# Altium PCB PCB2.PcbDoc
Units mm, origin at the board's own origin, x right, y up, seen from the top; angles counter-clockwise.
Board outline 78.06 x 41.92 mm, 2 copper layers (Top Layer, Bottom Layer); 63 components, 34 nets, 175 pads, 3 vias.
Unrouted connection lines stored in the file: 74.
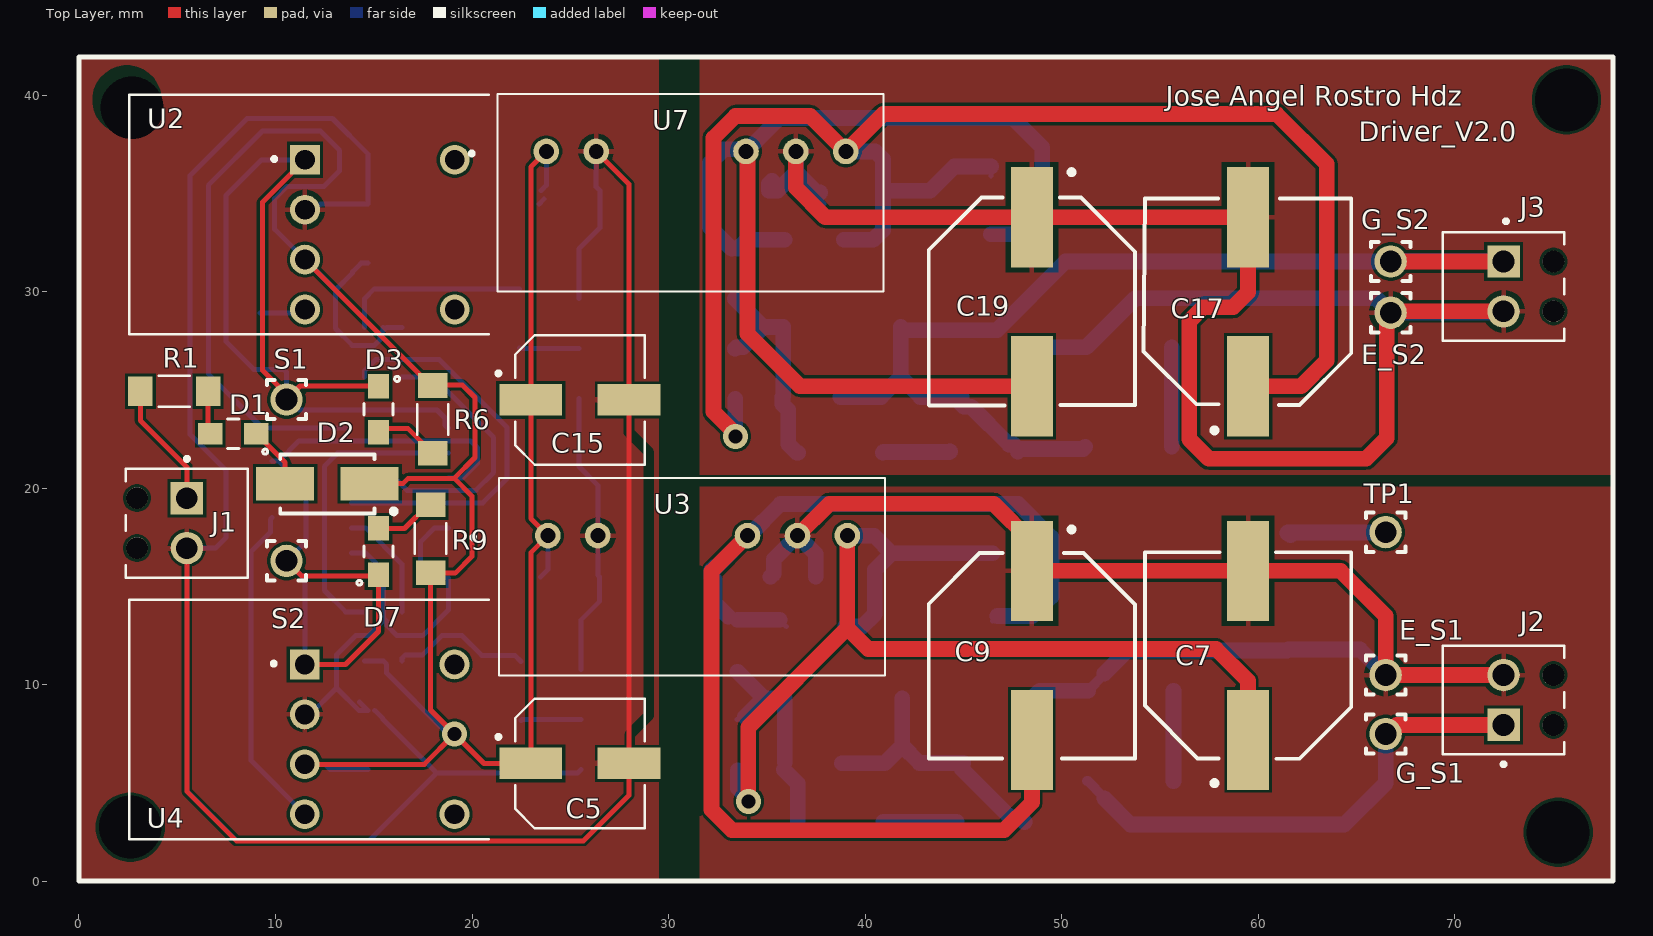
[diagram p0: Top Layer view]
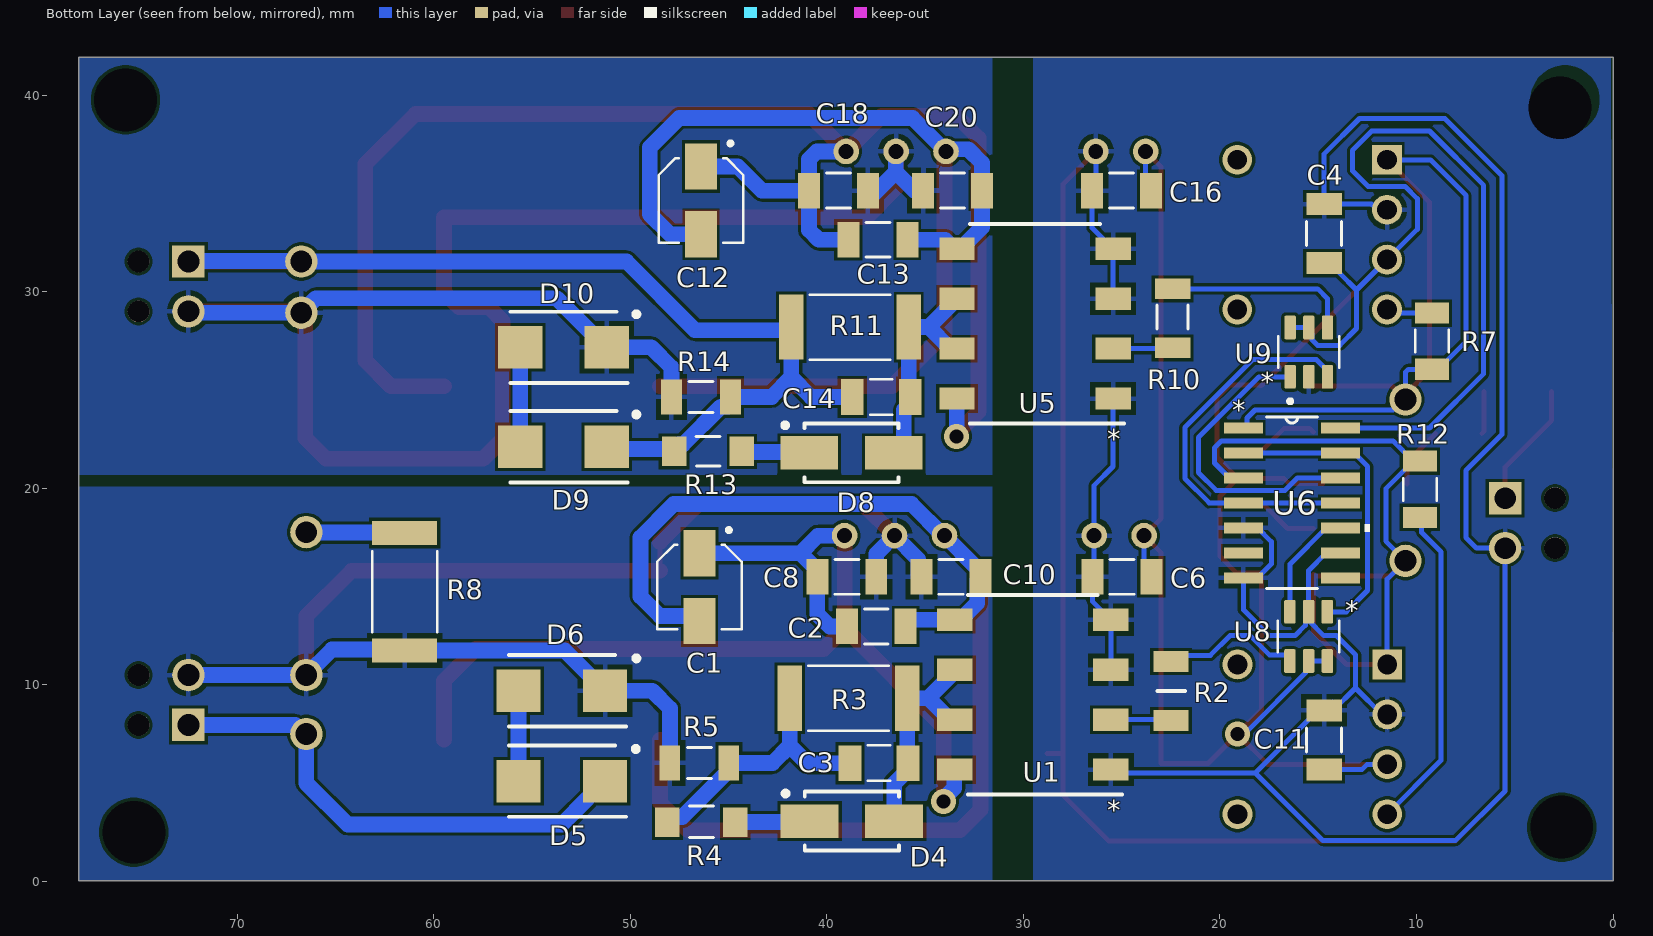
[diagram p1: Bottom Layer view, seen from below]
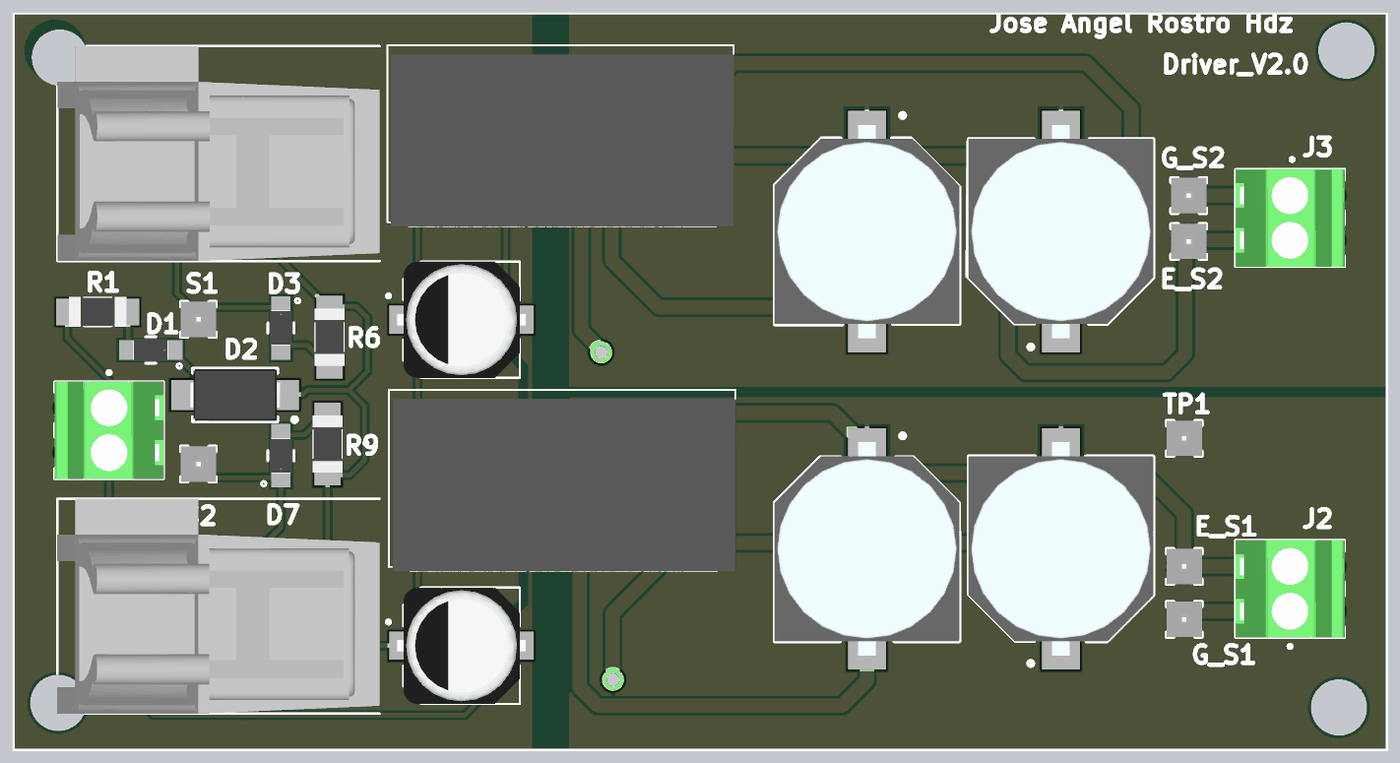
[diagram p2: 3D render of the assembled board from above, using the file's embedded part models]
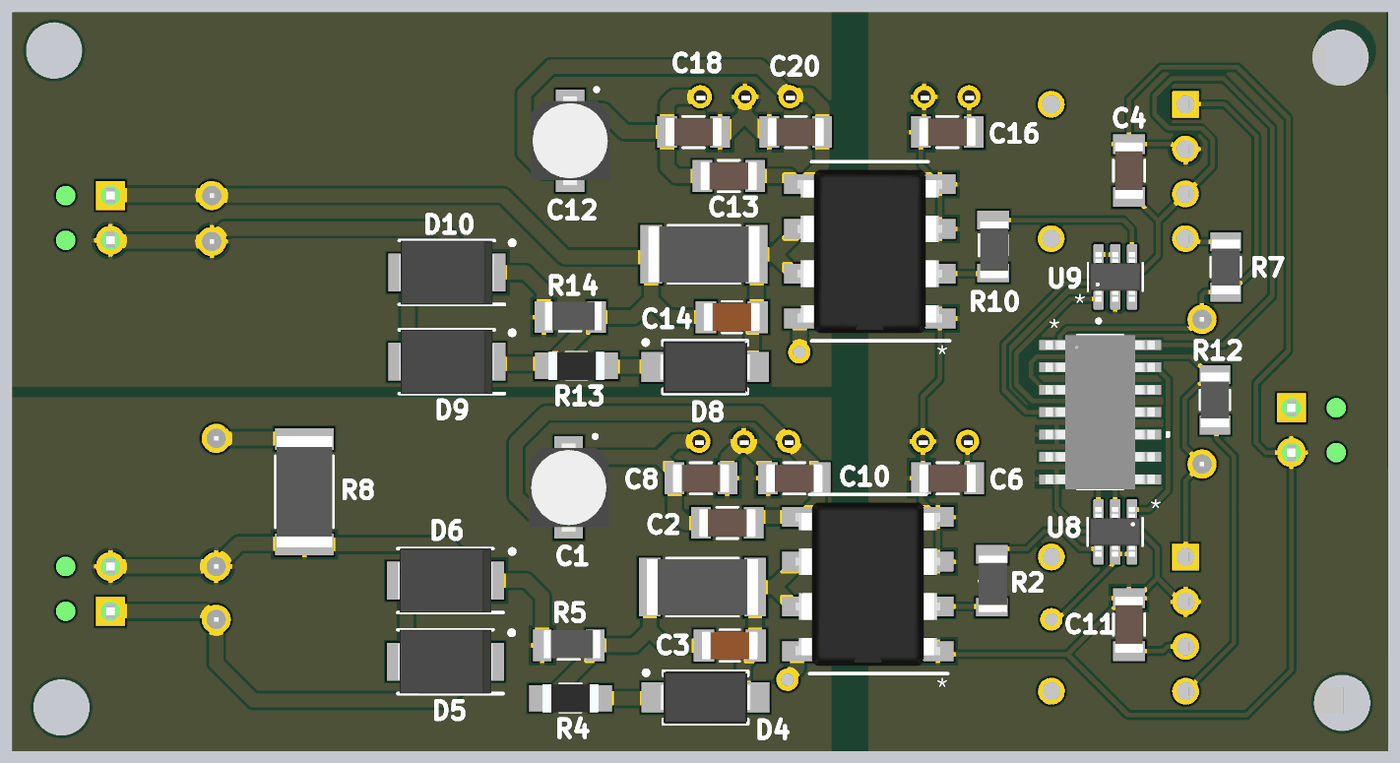
[diagram p3: 3D render of the assembled board from below, using the file's embedded part models]

## Layer stack, top to bottom
Top Solder: solder mask 0.0102, Solder Resist, Dk 3.5
Top Layer: signal copper 0.0356
Dielectric 1: dielectric 0.32, FR-4, Dk 4.8
Bottom Layer: signal copper 0.0356
Bottom Solder: solder mask 0.0102, Solder Resist, Dk 3.5

## Board outline
0,0.01 78.06,0.01 78.06,41.93 0,41.93

## Design rules (kind name [scope] priority, off if disabled: settings)
Clearance [All] p1: gap=0.15 ignorepadtopadclearanceinfootprint=FALSE
PlaneConnect [All] p1: planeconnectstyle=Direct reliefexpansion=0.508 reliefentries=4 reliefconductorwidth=0.254 reliefairgap=0.254
PolygonConnect [All] p1: connectstyle=Direct reliefconductorwidth=0.254 reliefentries=4 polygonreliefangle="90 Angle" airgapwidth=0.254
RoutingVias [All] p1: holewidth=0.711 width=1.27 viastyle="Through Hole" minholewidth=0.711 minwidth=1.27 maxholewidth=0.711 maxwidth=1.27
SolderMaskExpansion [All] p1: expansion=0.102 istentingtop=FALSE
Width Potencia [All] p1: maxlimit=0.8 minlimit=0.254 preferedwidth=0.5
Width Width_GND [InNet('GND_5VCC')] p2: maxlimit=3 minlimit=0.2 preferedwidth=0.8
Width [All] p3: maxlimit=0.254 minlimit=0.254 preferedwidth=0.254
29 further rules are at their usual default settings.

## Components (designator, comment, footprint, x,y, rotation, side; value= is the part's Value field where it differs from the comment)
C1 "1uF" CAPAE430X550N 46.49,14.967 r270 bottom
C2 "100nF" CAPC3216X94N#1 37.49,12.963 r0 bottom
C3 "470pF" CAPC3216X94N#2 37.35,6.005 r0 bottom
C4 "100nF" CAPC3216X94N#1 14.7,32.95 r90 bottom
C5 "22uF" CAP_EEE1HA220WP 25.49,5.991 r0 top
C6 "100nF" CAPC3216X94N#1 24.994,15.49 r180 bottom
C7 "220uF" CAPAE1050X1430N 59.49,11.49 r90 top
C8 "100nF" CAPC3216X94N#1 38.989,15.49 r0 bottom
C9 "220uF" CAPAE1050X1430N 48.49,11.49 r270 top
C10 "100nF" CAPC3216X94N#1 33.69,15.49 r0 bottom
C11 "100nF" CAPC3216X94N#1 14.7,7.192 r90 bottom
C12 "1uF" CAPAE430X550N 46.41,34.643 r270 bottom
C13 "100nF" CAPC3216X94N#1 37.41,32.64 r0 bottom
C14 "470pF" CAPC3216X94N#2 37.235,24.64 r0 bottom
C15 "22uF" CAP_EEE1HA220WP 25.49,24.49 r0 top
C16 "100nF" CAPC3216X94N#1 25.01,35.14 r180 bottom
C17 "220uF" CAPAE1050X1430N 59.49,29.49 r90 top
C18 "100nF" CAPC3216X94N#1 39.41,35.14 r0 bottom
C19 "220uF" CAPAE1050X1430N 48.49,29.49 r270 top
C20 "100nF" CAPC3216X94N#1 33.61,35.14 r0 bottom
D1 "LED_G" LED_KP-2012_KNB 7.854,22.77 r180 top
D2 "ES1ALHR3" DIOM4427X25M 12.64,20.22 r180 top
D3 "LED_G" LED_KP-2012_KNB 15.24,24.021 r270 top
D4 "ES1ALHR3" DIOM4427X25M 38.73,3.06 r180 bottom
D5 "DIODO ZENER1" DIOM5436X247N 53.49,5.09 r0 bottom
D6 "DIODO ZENER1" DIOM5436X247N 53.49,9.69 r0 bottom
D7 "LED_G" LED_KP-2012_KNB 15.24,16.776 r90 top
D8 "ES1ALHR3" DIOM4427X25M 38.75,21.8 r180 bottom
D9 "DIODO ZENER1" DIOM5436X247N 53.41,22.105 r0 bottom
D10 "DIODO ZENER1" DIOM5436X247N 53.41,27.165 r0 bottom
E_S1 "MTMM-101-X-X-S-X" SAMTEC_MTMM-101-X-X-S-X 66.49,10.49 r0 top
E_S2 "MTMM-101-X-X-S-X" SAMTEC_MTMM-101-X-X-S-X 66.745,28.928 r0 top
G_S1 "MTMM-101-X-X-S-X" SAMTEC_MTMM-101-X-X-S-X 66.49,7.49 r0 top
G_S2 "MTMM-101-X-X-S-X" SAMTEC_MTMM-101-X-X-S-X 66.745,31.533 r0 top
J1 "VDC_+5" PHOENIX_1725656#1 2.39,20.99 r270 top
J2 "Control_Signal" PHOENIX_1725656#2 75.59,6.45 r90 top
J3 "Control_Signal" PHOENIX_1725656#3 75.59,27.493 r90 top
R1 "2.2k" RES_ERJS08F2201V 4.85,24.93 r0 top
R2 "510R" RESC3216X60N 22.49,9.68 r270 bottom
R3 "10R" RESC6331X70N 38.905,9.315 r0 bottom
R4 "29R" ERJ8ENF1000V 46.39,3.01 r0 bottom
R5 "47K" RESC3216X60N 46.49,6.015 r180 bottom
R6 "2.2k" RES_ERJS08F2201V 18,23.5 r270 top
R7 "4.7K" RESC3116X65N 9.22,27.48 r90 bottom
R8 "1M" RESC6331X70N 61.49,14.73 r270 bottom
R9 "2.2k" RES_ERJS08F2201V 17.89,17.43 r90 top
R10 "510R" RESC3216X60N 22.41,28.64 r270 bottom
R11 "10R" RESC6331X70N 38.825,28.195 r0 bottom
R12 "4.7K" RESC3116X65N 9.83,19.94 r270 bottom
R13 "29R" ERJ8ENF1000V 46.05,21.87 r0 bottom
R14 "47K" RESC3216X60N 46.41,24.64 r180 bottom
S1 "MTMM-101-X-X-S-X" SAMTEC_MTMM-101-X-X-S-X 10.56,24.51 r0 top
S2 "MTMM-101-X-X-S-X" SAMTEC_MTMM-101-X-X-S-X 10.56,16.3 r0 top
TP1 "MTMM-101-X-X-S-X" SAMTEC_MTMM-101-X-X-S-X 66.49,17.76 r0 top
U1 "ACPL-3130-360E" DIP794W53P254L959H508Q8N 29.52,9.49 r0 bottom
U2 "HFBR-2531Z" XDCR_HFBR-2531Z 15.31,32.9 r90 top
U3 "MGJ2D051505SC_6" MGJ2D051505SC 30.49,15.49 r0 top
U4 "HFBR-2531Z" XDCR_HFBR-2531Z 15.3,7.22 r90 top
U5 "ACPL-3130-360E" DIP794W53P254L959H508Q8N 29.41,28.37 r0 bottom
U6 "SN74LS04D" D14 16.341,19.25 r180 bottom locked
U7 "MGJ2D051505SC_6" MGJ2D051505SC 30.41,35.04 r0 top
U8 "SN74LVC1G11DBVR" SOT95P280X145-6N 15.49,12.455 r270 bottom
U9 "SN74LVC1G11DBVR" SOT95P280X145-6N 15.48,26.92 r90 bottom

## Footprints (in the part's own frame and the unit in brackets; to place one, negate y for a bottom-side part, rotate by r counter-clockwise, add the part's x,y. Pads: shape width x height; smd on the part's side, far side on the other; paste and mask are expansions set on the pad)
CAP_EEE1HA220WP [mm]
  rect 3.2x1.6 smd: 1(-2.5,0) 2(2.5,0)
  silkscreen extent -4.25,-3.3 3.3,3.3, body extent -3.65,-3.3 3.65,3.3, height 5.8
CAPAE430X550N [mm]
  rect 2.36x1.62 smd: 1(-1.725,0) 2(1.725,0)
  silkscreen extent -3,-2.15 2.15,2.15, body extent -2.5,-2.25 2.5,2.25, height 5.57
CAPAE1050X1430N [mm]
  rect 5.1x2.15 smd: 1(-4.3,0) 2(4.3,0)
  silkscreen extent -5.24,-5.25 5.25,5.25, body extent -6.05,-5.25 6.05,5.25, height 14.3
CAPC3216X94N#1 [mil]
  rect 44x71 smd: 1(-59,0) 2(59,0)
  silkscreen extent -24,-35 24,35, body extent -63,-31 63,31, height 37
CAPC3216X94N#2 [mil]
  rect 45.67x71.65 smd: 1(-58.07,0) 2(58.07,0)
  silkscreen extent -22,-35 22,35, body extent -63,-31 63,31, height 37
D14 [mil]
  rect 78x22 smd paste+0 mask+0: 1(-97,150) 2(-97,100) 3(-97,50) 4(-97,0) 5(-97,-50) 6(-97,-100) 7(-97,-150) 8(97,-150) 9(97,-100) 10(97,-50) 11(97,0) 12(97,50) 13(97,100) 14(97,150)
  silkscreen extent -51,-172 156,172, body extent -122,-172 122,172, height 69
DIOM4427X25M [mm] "Molded Diode, 2-Leads, Body 4.38x2.73mm, IPC Low Density"
  rect 2.95x1.7 smd: 1(-2.15,0) 2(2.15,0)
  silkscreen extent -3.5,-1.5 2.4,1.52, body extent -2.6,-1.48 2.6,1.48, height 2.5
DIOM5436X247N [mm]
  rect 2.25x2.15 smd: 1(-2.2,0) 2(2.2,0)
  silkscreen extent -3.27,-1.81 2.7,1.81, body extent -2.7,-1.81 2.7,1.81, height 2.47
DIP794W53P254L959H508Q8N [mm]
  rect 1.8x1.13 smd: 1(-3.97,3.81) 2(-3.97,1.27) 3(-3.97,-1.27) 4(-3.97,-3.81) 5(3.97,-3.81) 6(3.97,-1.27) 7(3.97,1.27) 8(3.97,3.81)
  silkscreen extent -4.53,-5.08 3.3,5.08, body extent -4.1,-4.64 4.1,4.64, height 7.56
ERJ8ENF1000V [mm]
  rect 1.25x1.5 smd: 1(-1.725,0) 2(1.725,0)
  body extent -1.6,-0.8 1.6,0.8, height 0.6
LED_KP-2012_KNB [mil]
  rect 49x43 smd paste+0 mask+0: 1(-46.26,0) 2(46.26,0)
  silkscreen extent -69,-30 11,41, body extent -39,-24 39,24, height 43
MGJ2D051505SC [mm]
  round 1.303 hole 0.76: 1(-6.63,2.095) 2(-4.09,2.095) 5(3.53,2.095) 6(6.07,2.095) 7(8.61,2.095)
  silkscreen extent -10.52,-5.02 10.53,5.02, body extent -8.94,-5.29 10.56,4.53, height 12.67
PHOENIX_1725656#1 [mm]
  rect 1.65x1.65 / inner round 1.65 / far side rect 1.65x1.65 hole 1.1: 1(1.5,3.1)
  round 1.65 hole 1.1: 2(4.04,3.1)
  round 1.1 hole 1.1 unplated: ""(1.5,0.56) ""(4.04,0.56)
  silkscreen extent -0.6,0 5.54,6.2, body extent 0,0 5.54,6.2, height 8.65
PHOENIX_1725656#2 [mm]
  rect 1.65x1.65 hole 1.1: 1(1.5,3.1)
  round 1.65 hole 1.1: 2(4.04,3.1)
  round 1.1 hole 1.1 unplated: ""(1.5,0.56) ""(4.04,0.56)
  silkscreen extent -0.6,0 5.54,6.2, body extent 0,0 5.54,6.2, height 8.65
PHOENIX_1725656#3 [mm]
  round 1.65 hole 1.1: 1(1.5,3.1)
  rect 1.65x1.65 hole 1.1: 2(4.04,3.1)
  round 1.1 hole 1.1 unplated: ""(1.5,0.56) ""(4.04,0.56)
  silkscreen extent 0,0 6.19,6.2, body extent 0,0 5.54,6.2, height 8.65
RES_ERJS08F2201V [mm]
  rect 1.25x1.5 smd: 1(-1.725,0) 2(1.725,0)
  silkscreen extent -0.78,-0.8 0.78,0.8, body extent -1.63,-0.85 1.63,0.85, height 0.66
RESC3116X65N [mm]
  rect 1.07x1.73 smd: 1(-1.43,0) 2(1.43,0)
  silkscreen extent -0.57,-0.85 0.57,0.85, body extent -1.55,-0.8 1.55,0.8, height 0.65
RESC3216X60N [mm]
  rect 1.05x1.8 smd: 1(-1.5,0) 2(1.5,0)
  silkscreen extent 0,-0.7 0,0.7, body extent -1.42,-0.74 1.78,0.86, height 0.55
RESC6331X70N [mm]
  rect 1.24x3.32 smd: 1(-2.99,0) 2(2.99,0)
  silkscreen extent -2.05,-1.65 2.05,1.65, body extent -3.15,-1.58 3.15,1.58, height 0.7
SAMTEC_MTMM-101-X-X-S-X [mm]
  round 1.65 hole 1.1: 01(0,0)
  silkscreen extent -1,-1 1,1, body extent -1,-1 1,1, height 4.55
SOT95P280X145-6N [mm]
  rrect25% 1.21x0.58 smd: 1(-1.255,0.95) 2(-1.255,0) 3(-1.255,-0.95) 4(1.255,-0.95) 5(1.255,0) 6(1.255,0.95)
  silkscreen extent -0.8,-1.56 0.8,1.56, body extent -1.4,-1.45 1.4,1.45, height 1.45
XDCR_HFBR-2531Z [mm]
  rect 1.518x1.518 / inner round 1.518 / far side rect 1.518x1.518 hole 1.01: 1(3.81,3.81)
  round 1.518 hole 1.01: 2(1.27,3.81) 3(-1.27,3.81) 4(-3.81,3.81) 5(-3.81,-3.81) 8(3.81,-3.81)
  silkscreen extent -5.08,-5.54 7.11,12.75, body extent -5.08,-5.54 7.11,12.75, height 18.8

## Part data
C1 C12: library part UWX1H010MCL1GB, "Capacitor 1uF", Mfr_Name=Nichicon
C2 C4 C6 C8 C10 C11 C13 C16 C18 C20: library part 12063C104MAT2A, "Capacitor", Manufacturer_Name="Kyocera AVX", Mouser Part Number=581-12063C104MAT2A, Arrow Part Number=12063C104MAT2A, Arrow Price/Stock=https://www.arrow.com/en/products/12063c104mat2a/avx, Manufacturer_Part_Number=12063C104MAT2A, Mouser Price/Stock=https://www.mouser.co.uk/ProductDetail/KYOCERA-AVX/12063C104MAT2A?qs=m0JgOP0RQqUryqdkhb8UmQ%3D%3D
C3 C14: library part MC1206N471J101CT, "Cap Ceramic 470pF 100V C0G 5% Pad SMD 1206 125Â°C T/R", Package="3216 AVX", Check_prices=https://www.snapeda.com/parts/12061A471JAT2A/Kyocera/view-part/?ref=eda, MF="KYOCERA AVX Components", MP=12061A471JAT2A, SnapEDA_Link=https://www.snapeda.com/parts/12061A471JAT2A/Kyocera/view-part/?ref=snap
C5 C15: library part EEE1HA220WP, "22ÂµF 50V Aluminum Electrolytic Capacitors Radial, Can - SMD 1000 Hrs @ 85Â°C", Package="RADIAL-2 Panasonic", Check_prices=https://www.snapeda.com/parts/EEE1HA220WP/Panasonic/view-part/?ref=eda, Digi-Key_Part_Number=PCE3920TR-ND, MF=Panasonic, MP=EEE1HA220WP, SnapEDA_Link=https://www.snapeda.com/parts/EEE1HA220WP/Panasonic/view-part/?ref=snap
C7 C9 C17 C19: library part MAL215097102E3, "Capacitor Polarised", Manufacturer_Name=Vishay, Mouser Part Number=594-MAL215097102E3, Arrow Part Number=MAL215097102E3, Arrow Price/Stock=https://www.arrow.com/en/products/mal215097102e3/vishay?region=europe, Datasheet Link=https://www.vishay.com/docs/28395/150crz.pdf, Height=14.3mm, Manufacturer_Part_Number=MAL215097102E3, Mouser Price/Stock=https://www.mouser.co.uk/ProductDetail/Vishay-BC-Components/MAL215097102E3?qs=qmStTZH4TznNa7zgwdGJWg%3D%3D
D1 D3 D7: library part KP-2012SGC, "KP-2012SGC", Manufacturer_Name=Kingbright, Copyright="Copyright (C) 2025 Ultra Librarian. All rights reserved.", Manufacturer_Part_Number=KP-2012SGC, Type="LED Indication"
D2 D4 D8: library part ES1ALHR3_1, "Rectifiers 1A, 50V, SUPER FAST SM RECTIFIER", Manufacturer_Name="Taiwan Semiconductor", Mouser Part Number=821-ES1ALHR3, Datasheet Link=https://componentsearchengine.com/Datasheets/1/ES1ALHR3.pdf, Geometry.Height=1.43mm, Manufacturer_Part_Number=ES1ALHR3, Mouser Price/Stock=https://www.mouser.co.uk/ProductDetail/Taiwan-Semiconductor/ES1ALHR3?qs=70cth9uAySfs%2F8RIhd19cA%3D%3D
D5 D6 D9 D10: library part 1SMB5931BT3G, "Zener Diode", Manufacturer_Name=onsemi, Mouser Part Number=863-1SMB5931BT3G, Arrow Part Number=1SMB5931BT3G, Arrow Price/Stock=https://www.arrow.com/en/products/1smb5931bt3g/on-semiconductor?region=nac, Datasheet Link=https://www.onsemi.com/pub/Collateral/1SMB5913BT3-D.PDF, Height=2.47mm, Manufacturer_Part_Number=1SMB5931BT3G, Mouser Price/Stock=https://www.mouser.co.uk/ProductDetail/onsemi/1SMB5931BT3G?qs=vLkC5FC1VN903PRAv1AUyg%3D%3D
E_S1 E_S2 G_S1 G_S2 S1 S2 TP1: "Connector Header Through Hole 1 position", Package=None, Check_prices=https://www.snapeda.com/parts/MTMM-101-05-G-S-225/Samtec/view-part/?ref=eda, MF=Samtec, MP=MTMM-101-05-G-S-225, SnapEDA_Link=https://www.snapeda.com/parts/MTMM-101-05-G-S-225/Samtec/view-part/?ref=snap
J1 J2 J3: library part 1725656, "Conn PC Terminal Block 2 POS 2.54mm Solder ST Thru-Hole 6A Cardboard"
R1: library part ERJS08F2201V, "ERJS08F2201V", Package=None, Availability=Unavailable, MP=ERJS08F2201V, Price=None
R2 R10: library part CRCW1206510RFKEA, "Resistor", Manufacturer_Name=Vishay, Mouser Part Number=71-CRCW1206-510-E3, Arrow Part Number=CRCW1206510RFKEA, Arrow Price/Stock=https://www.arrow.com/en/products/crcw1206510rfkea/vishay?region=nac, Datasheet Link=http://www.vishay.com/docs/20035/dcrcwe3.pdf, Height=0.6mm, Manufacturer_Part_Number=CRCW1206510RFKEA, Mouser Price/Stock=https://www.mouser.co.uk/ProductDetail/Vishay-Dale/CRCW1206510RFKEA?qs=ZY%2FA15UmqnAPhzXgP9t8Ag%3D%3D
R3 R11: library part CRCW251210R0FKEGHP, "10 Ohms Â±1% 1.5W Chip Resistor 2512 (6432 Metric) Automotive AEC-Q200, Pulse Withstanding Thick Film", Package="6331 Vishay", Check_prices=https://www.snapeda.com/parts/CRCW251210R0FKEGHP/Vishay/view-part/?ref=eda, MF=Vishay, MP=CRCW251210R0FKEGHP, SnapEDA_Link=https://www.snapeda.com/parts/CRCW251210R0FKEGHP/Vishay/view-part/?ref=snap
R4 R13: library part ERJ-8ENF30R0V, "Resistor", Manufacturer_Name=Panasonic, Mouser Part Number=667-ERJ-8ENF30R0V, Arrow Part Number=ERJ-8ENF30R0V, Arrow Price/Stock=https://www.arrow.com/en/products/erj-8enf30r0v/panasonic?region=nac, Datasheet Link=https://industrial.panasonic.com/cdbs/www-data/pdf/RDA0000/AOA0000C86.pdf, Height=0.7mm, Manufacturer_Part_Number=ERJ-8ENF30R0V, Mouser Price/Stock=https://www.mouser.co.uk/ProductDetail/Panasonic/ERJ-8ENF30R0V?qs=8%252BG0TiN%2FgVqUsQIC4%252BVXug%3D%3D
R5 R14: library part CRCW120647K0FKEA, "Resistor", Manufacturer_Name=Vishay, Mouser Part Number=71-CRCW1206-47K-E3, Arrow Part Number=CRCW120647K0FKEA, Arrow Price/Stock=https://www.arrow.com/en/products/crcw120647k0fkea/vishay, Datasheet Link=http://www.vishay.com/docs/20035/dcrcwe3.pdf, Height=0.6mm, Manufacturer_Part_Number=CRCW120647K0FKEA, Mouser Price/Stock=https://www.mouser.co.uk/ProductDetail/Vishay-Dale/CRCW120647K0FKEA?qs=9sFvXT%252Bien1tefUS4L1XFw%3D%3D
R6 R9: library part ERJS08F2201V, "Resistor Film ERJS08F2201V", Package=None, Availability=Unavailable, MP=ERJS08F2201V, Price=None
R7 R12: library part CRS1206-FX-4701ELF, "RES, SMD, 4.7K ohm, 0.5W, 1%, 1206, TCR100", Package="3116 Bourns", Check_prices=https://www.snapeda.com/parts/CRS1206-FX-4701ELF/Bourns/view-part/?ref=eda, MF=Bourns, MP=CRS1206-FX-4701ELF, SnapEDA_Link=https://www.snapeda.com/parts/CRS1206-FX-4701ELF/Bourns/view-part/?ref=snap
R8: library part HV733ATTE1004F, "Resistencia SMD de Tipo Chip, 1 Mohm, ± 1%, 1 W, 2512 [Métrica 6432], Película Gruesa", Mfr_Name="KOA Speer"
U1 U5: "Integrated Circuit", Manufacturer_Name="Avago Technologies", Mouser Part Number=630-ACPL-3130-360E, Datasheet Link=https://datasheet.datasheetarchive.com/originals/distributors/Datasheets-DGA20/76560.pdf, Height=4.7mm, Manufacturer_Part_Number=ACPL-3130-360E, Mouser Price/Stock=https://www.mouser.co.uk/ProductDetail/Broadcom-Avago/ACPL-3130-360E?qs=RuhU64sK2%252BvV1O6%252BbM9CBg%3D%3D
U2 U4: "Fiber Optic Receiver - 5MBd - 7V 10 mA", Package=None, Check_prices=https://www.snapeda.com/parts/HFBR-2531Z/Broadcom+Limited/view-part/?ref=eda, MF="Broadcom Limited", MP=HFBR-2531Z, SnapEDA_Link=https://www.snapeda.com/parts/HFBR-2531Z/Broadcom+Limited/view-part/?ref=snap
U3 U7: library part MGJ2D051505SC, "Undefined or Miscellaneous", Manufacturer_Name="Murata Electronics", Mouser Part Number=580-MGJ2D051505SC, Arrow Part Number=MGJ2D051505SC, Arrow Price/Stock=https://www.arrow.com/en/products/mgj2d051505sc/murata-power-solutions?region=nac, Datasheet Link=https://power.murata.com/datasheet?/data/power/ncl/kdc_mgj2.pdf, Height=12mm, Manufacturer_Part_Number=MGJ2D051505SC, Mouser Price/Stock=https://www.mouser.co.uk/ProductDetail/Murata-Power-Solutions/MGJ2D051505SC?qs=xLDY6iXSiQZoZsK%252BwBpeSQ%3D%3D
U6: "Integrated Circuit", Mfr_Name="Texas Instruments", RefDes=RefDes, Type=Type
U8 U9: "1-ch, 3-input 1.65-V to 5.5-V 32 mA drive strength AND gate", Package="SOT-23-6 Texas Instruments", Check_prices=https://www.snapeda.com/parts/SN74LVC1G11DBVR/Texas+Instruments/view-part/?ref=eda, MF="Texas Instruments", MP=SN74LVC1G11DBVR, SnapEDA_Link=https://www.snapeda.com/parts/SN74LVC1G11DBVR/Texas+Instruments/view-part/?ref=snap

## Free pads (board coordinates)
  round 1.524 hole 3.2 unplated: 7(2.61,2.75) 7(2.7,39.36) 7(75.27,2.49) 7(75.69,39.76)

## Via types
v1: diameter 1.27, hole 0.711, Top Layer to Bottom Layer, 3 vias

## Nets (pads, with @x,y where several pads share a name; then routed paths per layer and width w, separated by ;. In a path a pad name is that pad's centre, name@x,y a point inside that pad or via, vN(x,y) a via of type N, cw(c..) or ccw(c..) an arc to the next point about the centre after c; other vN are vias at no path point)
+5VCC: C4.1 C5.1 C6.2 C11.1 C15.1 C16.2 D2.1 R6.1 R9.1 U2.3 U3.1 U4.3 U6.14 U7.1 U8.5 U8.6 U9.5 U9.6 | length 141.1
  Top Layer w0.254: U4.3 17.57,5.95 v1(19.11,7.49) ; U2.3 17.377,25.753 17.377,25.723 17.875,25.225 R6.1 18.028,25.253 19.507,25.253 20.15,24.61 20.15,21.56 19.09,20.5 ; D2.1 14.819,20.249 16.497,20.249 16.748,20.5 19.09,20.5 ; U7.1 22.99,36.345 22.99,18.455 U3.1 22.99,16.715 C5.1 20.609,5.991 v1(19.11,7.49) ; 19.09,20.5 19.99,19.6 19.99,16.52 19.145,15.675 17.92,15.675 R9.1 17.89,8.71 v1(19.11,7.49)
  Bottom Layer w0.254: U4.3 12.51,5.95 12.767,5.693 C11.1 ; U6.14@13.629,23.06 9.34,23.06 6.58,25.82 6.58,35.41 9.34,38.17 12.28,38.17 13.26,37.19 13.26,36.15 12.46,35.35 10.58,35.35 9.96,34.73 9.96,33.17 13.05,30.08 ; U8.6 U8.5 15.653,11.037 15.653,10.596 18.564,7.684 18.916,7.684 v1(19.11,7.49) ; C4.1 14.357,31.451 13.925,31.02 13.925,30.955 13.05,30.08 ; U9.5@15.48,28.022 U9.5 ; U9.6 15.643,28.175 15.317,27.849 15.317,27.547 15.04,27.27 13.9,27.27 13.05,28.12 13.05,30.08 ; C16.2@23.416,34.463 C16.2@23.656,34.703 ; C6.2 23.86,15.854 U3.1 ; C16.2 23.78,35.409 U7.1 U7.1@23.656,37.011
E_S1: C7.2 C8.1 C9.1 C10.2 D6.1 E_S1.01 J2.2 R5.1 R8.2 U3.6 | length 77.1
  Top Layer w0.254: C9.1 C9.1@48.49,17.265
  Top Layer w0.8: U3.6 38.185,19.21 46.545,19.21 C9.1@48.49,17.265 ; C9.1 C7.2 64.19,15.79 66.49,13.49 E_S1.01 J2.2
  Bottom Layer w0.254: R8.2 R8.2@61.54,11.79
  Bottom Layer w0.5: D6.1@51.34,9.69 52.165,10.515 D6.1@52.165,10.565
  Bottom Layer w0.8: C10.2 35.347,15.649 35.347,16.372 U3.6 37.49,16.655 C8.1 ; R5.1 47.99,8.79 48.89,9.69 D6.1@51.34,9.69 ; D6.1@52.165,10.565 53.34,11.74 R8.2 ; R8.2@61.54,11.79 65.19,11.79 E_S1.01 J2.2
E_S2: C17.2 C18.1 C19.1 C20.2 D10.1 E_S2.01 J3.1 R14.1 U7.6 | length 95.5
  Top Layer w0.8: U7.6 36.48,36.015 36.48,35.28 37.97,33.79 C19.1 C17.2 59.49,29.97 58.72,29.2 57.2,29.2 56.49,28.49 56.49,22.49 57.49,21.49 65.49,21.49 66.553,22.553 66.553,28.706 66.682,28.865 66.816,28.999 J3.1@72.484,28.999
  Bottom Layer w0.254: C18.1@37.525,34.849 C18.1@37.911,34.463
  Bottom Layer w0.8: C20.2@35.267,35.642 35.109,35.483 C20.2 35.55,35.14 36.5,36.09 ; U7.6 36.5,37.115 36.5,36.09 ; C18.1@37.711,35.046 37.544,35.046 36.5,36.09 ; R14.1 47.91,26.14 48.935,27.165 51.26,27.165 53.755,29.66 66.013,29.66 E_S2.01 72.425,28.928 J3.1
G_S1: C3.2 D5.1 G_S1.01 J2.1 R3.2 R4.2 R5.2 | length 45.9
  Top Layer w0.8: G_S1.01@66.55,7.43 67.069,7.95 J2.1
  Bottom Layer w0.254: R5.2@44.89,5.915 R5.2
  Bottom Layer w0.5: D5.1 51.34,5.09 52.165,4.265 D5.1@52.165,4.215
  Bottom Layer w0.8: C3.2 41.005,6.005 41.895,6.895 ; R3.2 41.895,6.895 ; R5.2@44.89,5.915 44.89,5.74 47.38,3.25 47.89,3.25 48.115,3.025 R4.2 ; R5.2 42.775,6.015 41.895,6.895 ; D5.1@52.165,4.215 53.49,2.89 64.39,2.89 66.49,4.99 G_S1.01 66.609,7.49 67.069,7.95 J2.1
G_S2: C14.2 D9.1 G_S2.01 J3.2 R11.2 R13.2 R14.2 | length 55.3
  Top Layer w0.8: G_S2.01 J3.2
  Bottom Layer w0.254: R11.2 R11.2@41.97,28.04
  Bottom Layer w0.8: C14.2@38.745,24.64 40.815,24.64 41.815,25.64 ; R11.2 41.815,25.64 ; R11.2@41.97,28.04 46.71,28.04 50.203,31.533 G_S2.01 ; D9.1 51.092,21.987 47.893,21.987 R13.2 47.775,21.995 47.55,22.22 47.33,22.22 45.41,24.14 45.035,24.14 44.91,24.265 R14.2 42.815,24.64 41.815,25.64 ; G_S2.01@66.767,31.555 72.468,31.555 J3.2
GND_5VCC: C4.2 C5.2 C6.1 C11.2 C15.2 C16.1 J1.2 pad.7@2.7,39.36 U1.1 U1.3 U1.4 U2.2 U3.2 U4.2 U5.1 U5.3 U5.4 U6.5 U6.7 U6.9 U7.2 U8.2 U9.2 | length 196.2
  Top Layer w0.254: J1.2 5.49,4.57 8.01,2.05 25.67,2.05 27.99,4.37 27.99,22.831 C15.2 27.99,35.465 U7.2 ; C5.2@28.023,6.49 C5.2@28.79,6.49
  Bottom Layer w0.254: U4.2 11.76,8.49 13.1,9.83 ; U2.2 11.742,34.412 12.244,34.412 12.281,34.449 C4.2 14.7,37.008 12.898,38.81 8.56,38.81 5.66,35.91 5.66,22.73 7.49,20.9 7.49,17.49 6.95,16.95 J1.2 5.49,4.59 8.02,2.06 14.754,2.06 18.199,5.505 ; U6.9 14.589,16.71 15.49,15.809 U8.2 U8.2@15.49,13.395 ; C11.2@14.268,9.122 C11.2 14.24,8.69 13.1,9.83 ; C11.2@15.043,8.69 15.475,8.258 15.475,8.229 18.199,5.505 ; U6.5 18.094,17.98 17.39,17.276 17.39,16.144 18.094,15.44 U6.7 18.805,13.805 17.49,12.49 16.186,12.49 15.653,13.023 15.653,13.232 U8.2@15.49,13.395 ; U5.1 25.44,21.101 26.4,20.141 U3.2 26.4,15.583 C6.1 26.493,14.243 U1.4 U1.3 ; U5.3 U5.4 26.509,33.249 C16.1 26.32,35.329 U7.2 ; U1.1 25.375,5.505 18.199,5.505 ; 13.1,9.83 13.1,11.52 14.07,12.49 14.711,12.49 15.49,13.269 U8.2@15.49,13.395
NetC3_1: C3.1 D4.2 R3.1 U1.6 U1.7 | length 11.4
  Bottom Layer w0.254: U1.7 33.635,8.365 U1.7@33.885,8.365 ; U1.6@33.512,10.66 U1.6@33.512,10.76 ; C3.1@35.875,5.675 C3.1 C3.1@35.915,6.045
  Bottom Layer w0.8: U1.6@33.512,10.66 34.857,9.315 R3.1 C3.1@35.915,6.045 ; U1.7@33.885,8.365 34.835,9.315 ; C3.1@35.875,5.675 36.58,4.97 D4.2
NetC14_1: C14.1 D8.2 R11.1 U5.6 U5.7 | length 11.7
  Bottom Layer w0.5: C14.1@35.795,24.64 C14.1@35.835,24.68
  Bottom Layer w0.8: U5.7 33.443,27.163 33.793,27.163 34.825,28.195 ; U5.6 34.825,28.195 ; C14.1@35.795,24.64 35.795,24.275 36.09,23.98 36.09,22.25 36.54,21.8 D8.2 ; C14.1@35.835,24.68 R11.1 34.825,28.195
NetD1_1: D1.1 D2.2 | length 3.2
  Top Layer w0.254: D1.1 10.49,21.309 D2.2
NetD1_2: D1.2 R1.2 | length 2.2
  Top Layer w0.254: R1.2 6.575,22.874 D1.2
NetD3_2: D3.2 R6.2 | length 3.4
  Top Layer w0.254: D3.2 15.434,23.04 16.735,23.04 R6.2
NetD4_1: D4.1 R4.1 | length 3.8
  Bottom Layer w0.254: D4.1 D4.1@40.93,3.01
  Bottom Layer w0.8: D4.1@40.93,3.01 R4.1
NetD5_2: D5.2 D6.2 | length 4.6
  Bottom Layer w0.8: D5.2 D6.2
NetD7_2: D7.2 R9.2 | length 3.2
  Top Layer w0.254: D7.2 16.561,17.951 17.765,19.155 R9.2 R9.2@17.885,19.16
NetD8_1: D8.1 R13.1 | length 3.5
  Bottom Layer w0.8: D8.1 40.935,21.835 44.29,21.835 R13.1
NetD9_2: D9.2 D10.2 | length 5.1
  Bottom Layer w0.8: D9.2 D10.2
NetJ1_1: J1.1 R1.1 | length 6.4
  Top Layer w0.254: R1.1 3.125,23.445 5.49,21.08 J1.1
NetR2_2: R2.2 U1.2 | length 3.1
  Bottom Layer w0.254: R2.2 22.53,8.22 U1.2
NetR7_2: R7.2 U2.4 | length 2.4
  Bottom Layer w0.254: R7.2 11.32,28.91 U2.4
NetR8_1: R8.1 TP1.01 | length 5.2
  Bottom Layer w0.8: R8.1@61.647,17.615 61.542,17.72 R8.1 61.51,17.74 66.47,17.74 TP1.01
NetR10_2: R10.2 U5.2 | length 3
  Bottom Layer w0.254: R10.2 22.45,27.1 U5.2
NetR12_2: R12.2 U4.4 | length 16.7
  Bottom Layer w0.254: R12.2 9.733,18.413 9.733,17.743 8.75,16.76 8.75,6.15 U4.4
RS1: D3.1 R7.1 S1.01 U2.1 U6.1 | length 44.8
  Top Layer w0.254: U2.1 9.34,34.55 9.34,25.997 10.56,24.777 S1.01 11.246,25.196 D3.1
  Bottom Layer w0.254: S1.01 10.56,25.901 10.411,26.05 8.89,26.05 7.47,27.47 7.47,34.89 9.29,36.71 U2.1 ; S1.01@10.672,24.51 11.202,23.98 18.22,23.98 18.628,23.572 18.628,23.212 18.781,23.06 U6.1
RS1_IN: R2.1 U8.4 | length 7.2
  Bottom Layer w0.254: U8.4 16.44,11.352 16.603,11.515 17.49,11.515 18.465,12.49 19.49,12.49 20.49,11.49 22.18,11.49 R2.1
RS1n: U6.2 U6.13 U8.1 | length 15.4
  Bottom Layer w0.254: U8.1 13.57,13.71 12.49,14.79 12.49,21.114 13.166,21.79 U6.13 U6.2
RS1n2: U6.12 U9.1 | length 15.6
  Bottom Layer w0.254: U6.12 16.06,20.52 16.69,19.89 20.19,19.89 21.09,20.79 21.09,22.59 18.015,25.665 U9.1
RS2: D7.1 R12.1 S2.01 U4.1 U6.3 | length 37.9
  Top Layer w0.254: S2.01 11.33,15.53 15.169,15.53 D7.1 15.24,12.71 13.56,11.03 U4.1
  Bottom Layer w0.254: R12.1 R12.1@10.16,21.37 ; U4.1@11.351,11.169 U4.1 11.49,15.37 S2.01 11.56,17.3 11.56,19.97 R12.1@10.16,21.37 ; U6.3 19.516,20.52 20.275,21.279 20.275,22.055 19.93,22.4 11.19,22.4 R12.1@10.16,21.37
RS2_IN: R10.1 U9.4 | length 9.6
  Bottom Layer w0.254: U9.4 14.53,29.64 15.03,30.14 R10.1
RS2n: U6.4 U6.11 U9.3 | length 20.3
  Bottom Layer w0.254: U6.11 U6.4 20.55,19.25 21.79,20.49 21.79,23.09 18.333,26.547 15.097,26.547 14.53,25.98 U9.3
RS2n2: U6.10 U8.3 | length 5.7
  Bottom Layer w0.254: U6.10 14.589,17.98 16.44,16.129 U8.3
VCC_S1: C1.1 C2.2 C7.1 C8.2 U1.8 U3.7 | length 55.3
  Top Layer w0.5: v1@34.05,4.09 v1(34.08,4.06) ; C7.1@59.481,7.199 C7.1
  Top Layer w0.8: v1@34.05,4.09 34.05,7.83 39.1,12.88 ; U3.7 39.1,12.88 ; C7.1@59.481,7.199 59.481,10.197 57.858,11.82 40.16,11.82 39.1,12.88
  Bottom Layer w0.254: C2.2 C2.2@38.989,13.306
  Bottom Layer w0.5: U1.8 U1.8@33.52,5.65 ; v1(34.08,4.06) v1@34.08,4.178
  Bottom Layer w0.8: U1.8@33.52,5.65 33.52,4.738 v1@34.08,4.178 ; C2.2 39.863,12.963 40.487,13.587 40.487,15.833 41.346,16.692 ; U3.7 40.453,17.585 41.346,16.692 ; C1.1 41.346,16.692
VCC_S2: C12.1 C13.2 C17.1 C18.2 U5.8 U7.7 | length 80.7
  Top Layer w0.8: v1(33.41,22.64) 33.41,22.767 32.29,23.887 32.29,37.823 33.407,38.94 37.215,38.94 U7.7 40.925,39.04 60.94,39.04 63.49,36.49 63.49,26.49 62.19,25.19 C17.1
  Bottom Layer w0.254: U5.8 U5.8@33.395,24.545 ; v1@33.395,22.655 v1(33.41,22.64) ; U7.7 U7.7@39.104,37.051 ; C18.2 C18.2@40.91,35.141 ; C12.1@46.41,35.895 C12.1@46.41,36.265
  Bottom Layer w0.8: v1@33.395,22.655 U5.8@33.395,24.545 ; C13.2 40.41,32.64 40.909,33.139 C18.2 43.31,35.14 44.538,36.368 C12.1 ; U7.7 40.515,37.135 40.91,36.74 C18.2@40.91,35.141
VEE_S1: C1.2 C2.1 C9.2 C10.1 U1.5 U3.5 | length 67
  Top Layer w0.8: U3.5 32.19,15.755 32.19,3.63 33.23,2.59 47.07,2.59 48.49,4.01 C9.2
  Bottom Layer w0.254: U1.5@33.033,13.468 33.322,13.468 U1.5 ; C2.1@35.655,13.3 C2.1 ; C1.2 C1.2@46.738,13.49
  Bottom Layer w0.8: U1.5@33.033,13.468 32.35,14.151 32.35,15.331 C10.1 32.191,15.833 32.35,15.992 32.427,15.992 U3.5 ; U1.5 C2.1@35.655,13.3 ; U3.5@34.058,17.547 35.702,19.19 47.79,19.19 49.49,17.49 49.49,14.49 48.49,13.49 C1.2@46.738,13.49
VEE_S2: C12.2 C13.1 C19.2 C20.1 U5.5 U7.5 | length 57.6
  Top Layer w0.8: U7.5 34.02,37.055 34.02,27.86 36.69,25.19 C19.2
  Bottom Layer w0.254: U7.5@33.835,37.24 U7.5
  Bottom Layer w0.5: U5.5@33.21,32.18 U5.5@33.528,32.18
  Bottom Layer w0.8: U5.5@33.21,32.18 32.111,33.278 C20.1 32.111,36.541 32.81,37.24 U7.5@33.835,37.24 ; U5.5@33.528,32.18 33.988,32.64 C13.1 ; U7.5 35.645,38.84 47.51,38.84 49.01,37.34 49.01,33.94 47.988,32.918 C12.2
pads on no net: J1. J2. J3. U2.5 U2.8 U4.5 U4.8 U6.6 U6.8

## Polygon pours and split planes (outlines as drawn)
GND_5VCC on Top Layer "GND_5VCC_L01_P011" (solid, pour order 11): 29.49,41.93 29.49,0.01 0,0.01 0,41.93
E_S1 on Top Layer "E_S1_L01_P020" (solid, pour order 20): 31.59,20.08 31.59,0.01 78.06,0.01 78.06,20.08
E_S2 on Top Layer "E_S2_L01_P018" (solid, pour order 18): 31.59,20.68 31.59,41.93 78.06,41.93 78.06,20.68
GND_5VCC on Bottom Layer "GND_5VCC_L02_P007" (solid, pour order 7): 0,0.01 29.49,0.01 29.49,41.93 0.111,41.93
E_S2 on Bottom Layer "E_S2_L02_P016" (solid, pour order 16): 31.59,41.93 31.59,20.68 78.06,20.68 78.06,41.93
E_S1 on Bottom Layer "E_S1_L02_P017" (solid, pour order 17): 31.59,20.08 31.59,0.01 78.06,0.01 78.06,20.08

## Silkscreen, mask and mechanical layers (free items; w line width, h text height)
Top Overlay:
  circle w0.254: c57.78,4.99 r0.125
  circle w0.254: c50.51,17.9 r0.125
  circle w0.254: c57.78,22.94 r0.125
  circle w0.254: c50.51,36.08 r0.125
  lines w0.2: 43.24,6.24 46.96,6.24 ; 43.24,14.115 45.815,16.69 46.99,16.69 ; 43.24,24.24 43.27,24.21 47.1,24.21 ; 43.24,32.115 45.915,34.79 46.99,34.79 ; 49.91,34.79 50.98,34.79 53.74,32.03 ; 49.95,24.24 53.74,24.24 ; 50.03,6.24 53.74,6.24 ; 50.13,16.69 51.12,16.69 53.73,14.08 ; 54.17,26.96 56.86,24.27 57.98,24.27 ; 54.24,16.74 58.03,16.74 ; 54.24,34.74 57.96,34.74 ; 56.92,6.25 57.98,6.25 ; 60.91,16.74 64.74,16.74 ; 60.94,6.23 62.105,6.23 64.74,8.865 ; 61.07,24.24 62.115,24.24 64.74,26.865 ; 61.12,34.74 64.74,34.74
  lines w0.254: 0,0.01 0,41.94 78.06,41.94 78.06,0.01 0,0.01
  text "Jose Angel Rostro Hdz" at 55.31,39.45 h1
  text "Driver_V2.0" at 65.11,37.66 h1
Bottom Overlay:
  circle w0.254: c49.7,23.75 r0.125
  circle w0.254: c49.7,11.34 r0.125
  circle w0.254: c49.7,28.85 r0.125
  circle w0.254: c49.73,6.73 r0.125
  lines w0.152: 21.62,28.101 21.62,29.32 ; 23.21,28.101 23.21,29.32 ; 45.43,21.125 46.65,21.125 ; 45.44,22.635 46.66,22.635 ; 45.78,2.235 47,2.235 ; 45.78,3.825 47,3.825 ; 45.8,23.84 47.02,23.84 ; 45.8,25.43 47.02,25.43 ; 45.88,5.215 47.1,5.215 ; 45.88,6.805 47.1,6.805
  text "*" at 17.924,24.909 h1
  text "*" at 25.734,22.009 h1
  text "*" at 13.624,13.269 h1
  text "*" at 25.734,3.129 h1
Mechanical 1:
  lines w0.254: 0,0.01 0,41.93 20.475,41.93 57.585,41.93 78.06,41.93 78.06,0.01 0,0.01
Mechanical 13:
  lines w0.254: -3.15,0.01 -3.15,41.9 ; 0,-3.06 78.06,-3.06
  text "Driver V2.0 - 2025/10/01 - PCB lista para imprimir" at -0.25,45.98 h1.52
  text "41.93mm" at -13.85,20.61 h1.52
  text "78.06mm" at 34.08,-6.26 h1.52

## Text inside footprints (layer, text, board x,y; h text height)
U6: Bottom Overlay "*" at 19.376,23.492 h1; Mechanical 13 "*" at 19.376,23.492 h1.27